# Altium PCB RESISTORS-BOARD.PcbDoc
Units mm, origin at the board's own origin, x right, y up, seen from the top; angles counter-clockwise.
Board outline 50 x 70 mm, 2 copper layers (Top Layer, Bottom Layer), stack 1.571 mm thick; 6 components, 2 nets, 14 pads, 0 vias.
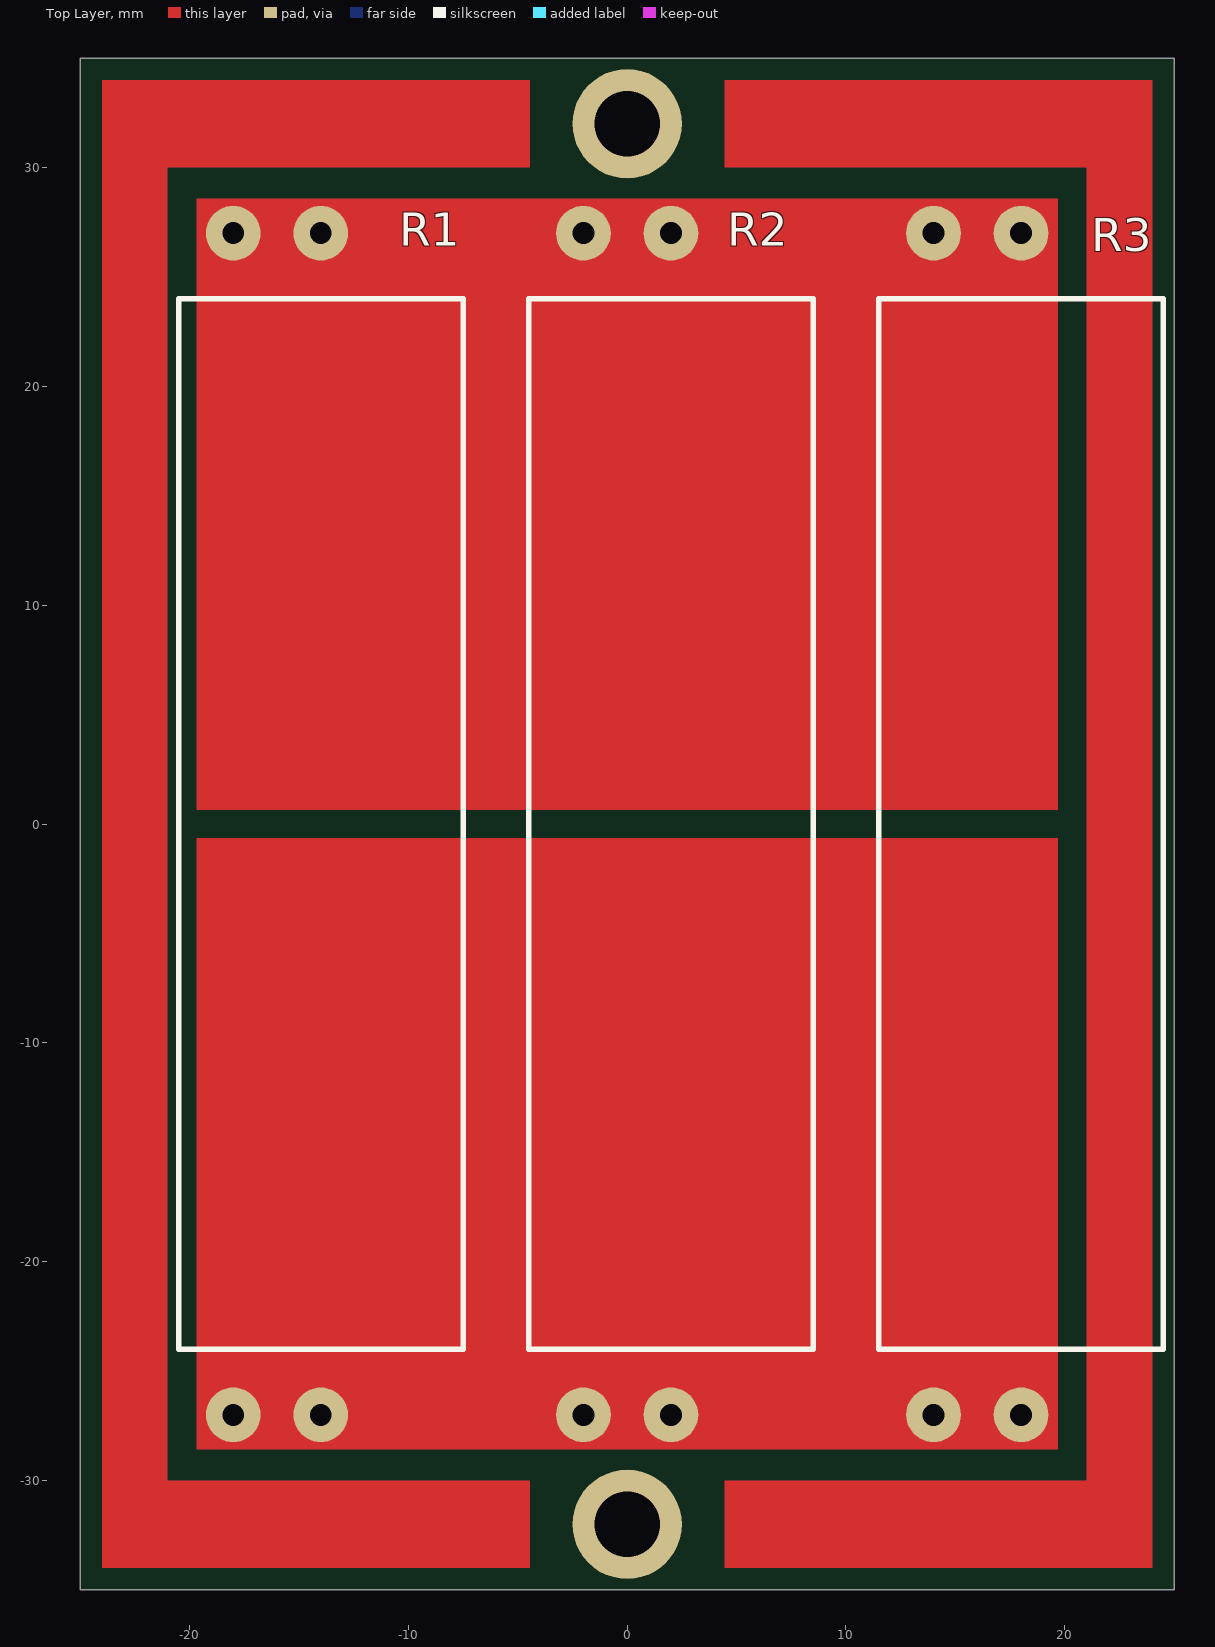
[diagram p0: Top Layer view]
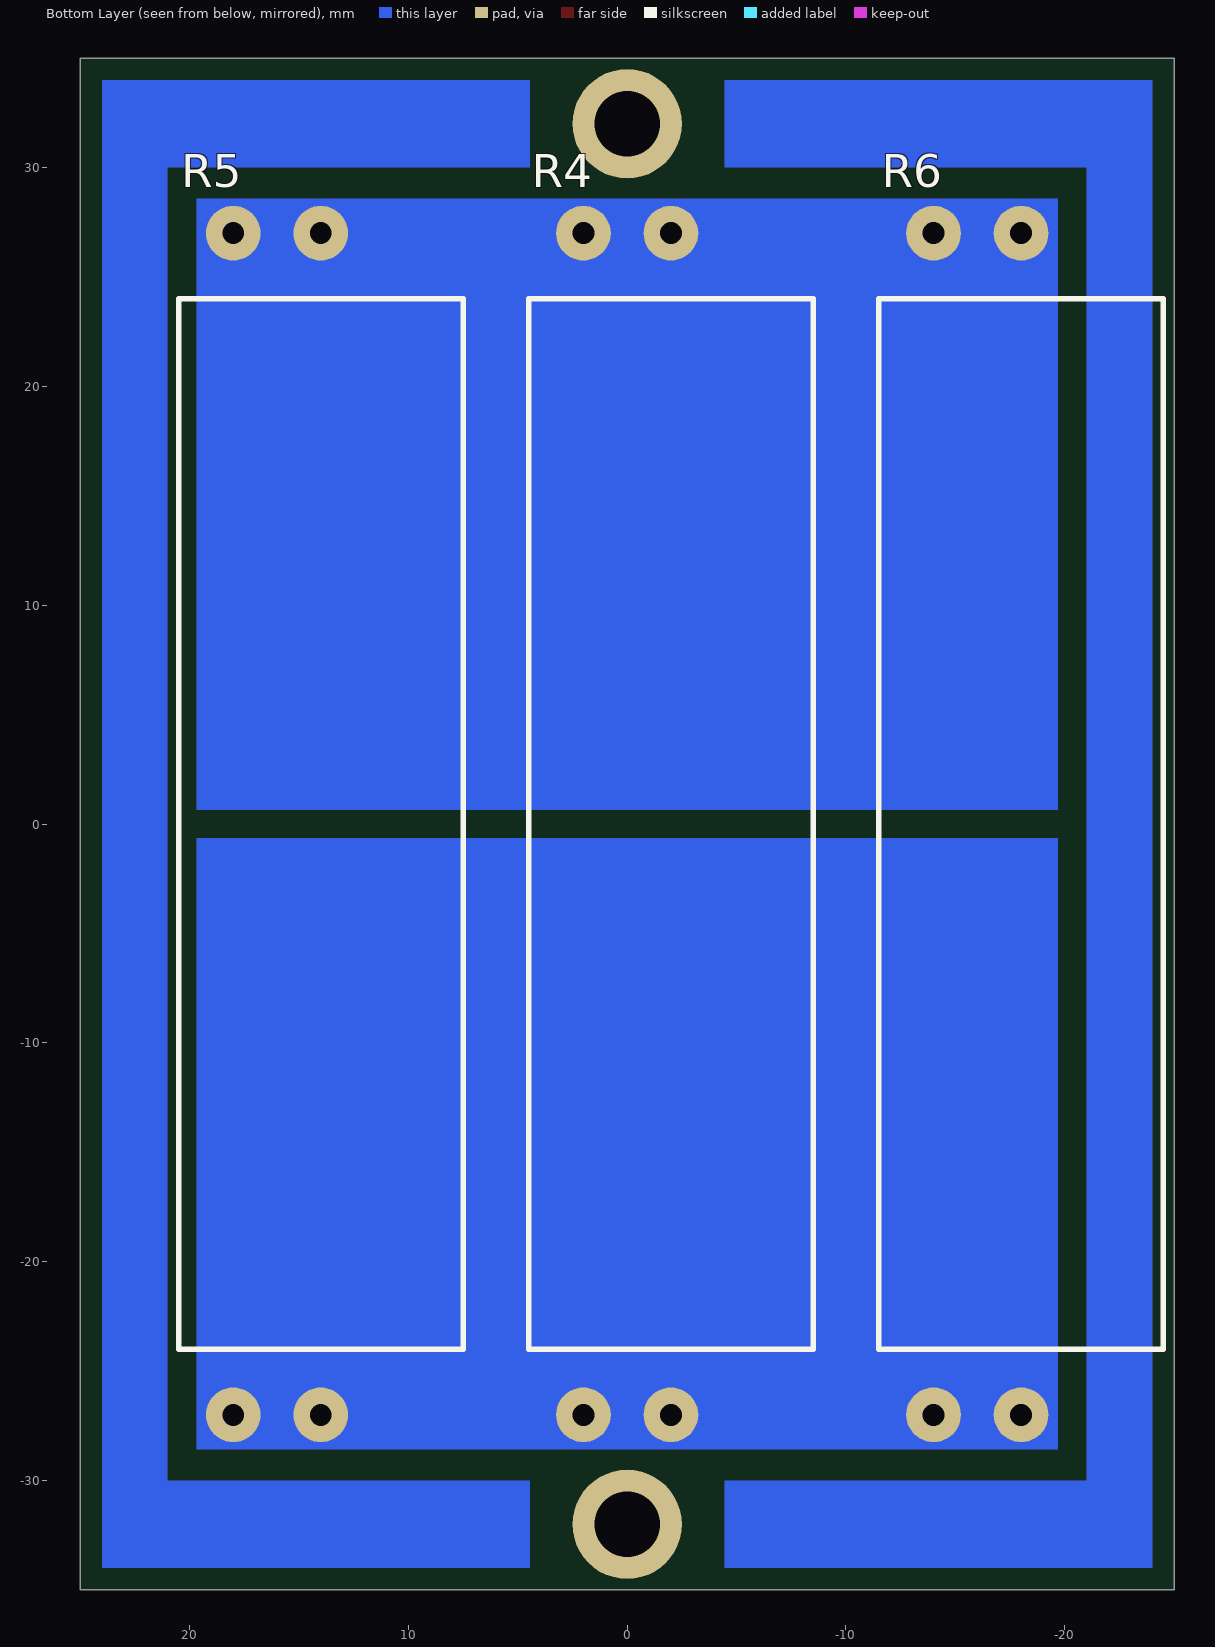
[diagram p1: Bottom Layer view, seen from below]

## Layer stack, top to bottom
Top Solder: solder mask 0.0102, Solder Resist, Dk 3.5
Top Layer: signal copper 0.0356
Dielectric 1: dielectric 1.5, FR-4, Dk 4.8
Bottom Layer: signal copper 0.0356
Bottom Solder: solder mask 0.0102, Solder Resist, Dk 3.5

## Board outline
-25,-35 -25,35 25,35 25,-35

## Design rules (kind name [scope] priority, off if disabled: settings)
Clearance [All] p1: gap=0.254 ignorepadtopadclearanceinfootprint=FALSE except(0: Arc-Hole Track-Hole SMDPad-Hole THPad-Hole Via-Hole Fill-Hole Poly-Hole Region-Hole Text-Hole)
PolygonConnect [All] p1: connectstyle=Relief reliefconductorwidth=0.254 reliefentries=4 polygonreliefangle="90 Angle" airgapwidth=0.254
RoomDefinition RESISTORS-BOARD [InComponentClass('RESISTORS-BOARD')] p1: confinementstyle=ConfineIn formatcopy=TRUE lockcomponents=FALSE outline 88.646,-49.149 174.879,-49.149 174.879,10.541 88.646,10.541
RoutingVias [All] p1: holewidth=0.711 width=1.27 viastyle="Through Hole" minholewidth=0.711 minwidth=1.27 maxholewidth=0.711 maxwidth=1.27
SolderMaskExpansion [All] p1: expansion=0.102
Width [All] p1: maxlimit=0.254 minlimit=0.254 preferedwidth=0.254
30 further rules are at their usual default settings.

## Components (designator, comment, footprint, x,y, rotation, side; value= is the part's Value field where it differs from the comment)
R1 "47R 15W" RES-CERAMICA-15W -14,0 r90 top
R2 "Resistencia Ceramica 15E 5% 15W SE15 RES.CEM" RES-CERAMICA-15W 2,0 r90 top
R3 "Resistencia Ceramica 15E 5% 15W SE15 RES.CEM" RES-CERAMICA-15W 18,0 r90 top
R4 "Resistencia Ceramica 15E 5% 15W SE15 RES.CEM" RES-CERAMICA-15W -2,0 r90 bottom
R5 "Resistencia Ceramica 15E 5% 15W SE15 RES.CEM" RES-CERAMICA-15W 14,0 r90 bottom
R6 "Resistencia Ceramica 15E 5% 15W SE15 RES.CEM" RES-CERAMICA-15W -18,0 r90 bottom

## Footprints (in the part's own frame and the unit in brackets; to place one, negate y for a bottom-side part, rotate by r counter-clockwise, add the part's x,y. Pads: shape width x height; smd on the part's side, far side on the other; paste and mask are expansions set on the pad)
RES-CERAMICA-15W [mm] "Resistenci ceramica 15W"
  round 2.5 hole 1: 1(-27,0) 2(27,0)
  silkscreen extent -24,-6.5 24,6.5, body extent -27.49,-6.22 27.3,6.28, height 12.5

## Part data
R1: library part "Resistencia Ceramica 15E 5% 15W SE15 RES.CEM", "Resistencia Ceramica 15E 5% 15W SE15 RES.CEM", COD. ELEMON=RS4176075
R2 R3 R4 R5 R6: COD. ELEMON=RS4176075

## Free pads (board coordinates)
  round 5 hole 3: 0(0,-32.004) 0(0,32)

## Nets (pads, with @x,y where several pads share a name; then routed paths per layer and width w, separated by ;. In a path a pad name is that pad's centre, name@x,y a point inside that pad or via, vN(x,y) a via of type N, cw(c..) or ccw(c..) an arc to the next point about the centre after c; other vN are vias at no path point)
12V: R1.2 R2.2 R3.2 R4.2 R5.2 R6.2
GND: R1.1 R2.1 R3.1 R4.1 R5.1 R6.1

## Other copper
Top Layer:
  rectangle net GND: -19.685,-28.575 -12.065,-20.828
  rectangle net GND: 12.065,-28.575 19.685,-20.828
  rectangle net GND: -3.81,-28.575 3.81,-20.828
  rectangle net GND: -19.685,-28.575 19.685,-0.635
  rectangle net 12V: -19.685,0.635 19.685,28.575
  rectangle net 12V: 12.065,20.828 19.685,28.575
  rectangle net 12V: -3.81,20.828 3.81,28.575
  rectangle net 12V: -19.685,20.828 -12.065,28.575
  region: -4.445,-30 -24,-30 -24,-34 -4.445,-34
  region: -21,30 -24,30 -24,-30 -21,-30
  region: -4.445,34 -24,34 -24,30 -4.445,30
  rectangle: 4.445,-34 24,-30
  rectangle: 21,-30 24,30
  rectangle: 4.445,30 24,34
Bottom Layer:
  rectangle net 12V: -19.685,24.511 -12.065,28.575
  rectangle net 12V: 12.065,25.4 19.685,28.575
  rectangle net GND: 12.065,-28.575 19.685,-25.273
  rectangle net GND: -3.81,-28.575 3.81,-24.511
  rectangle net GND: -19.685,-28.575 -12.065,-25.146
  rectangle net GND: -19.685,-28.575 19.685,-0.639
  rectangle net 12V: -19.685,0.635 19.685,28.575
  rectangle net 12V: -3.81,20.824 3.81,28.571
  region: -4.445,-30 -24,-30 -24,-34 -4.445,-34
  region: -21,30 -24,30 -24,-30 -21,-30
  region: -4.445,34 -24,34 -24,30 -4.445,30
  rectangle: 4.445,-34 24,-30
  rectangle: 21,-30 24,30
  rectangle: 4.445,30 24,34

## Silkscreen, mask and mechanical layers (free items; w line width, h text height)
Mechanical 1:
  the board outline again, w0.254